# Altium PCB PCB1.PcbDoc
Units mil, origin at the board's own origin, x right, y up, seen from the top; angles counter-clockwise.
Board outline 4195.03 x 2725.03 mil, 2 copper layers (Top Layer, Bottom Layer); 22 components, 13 nets, 112 pads, 8 vias.
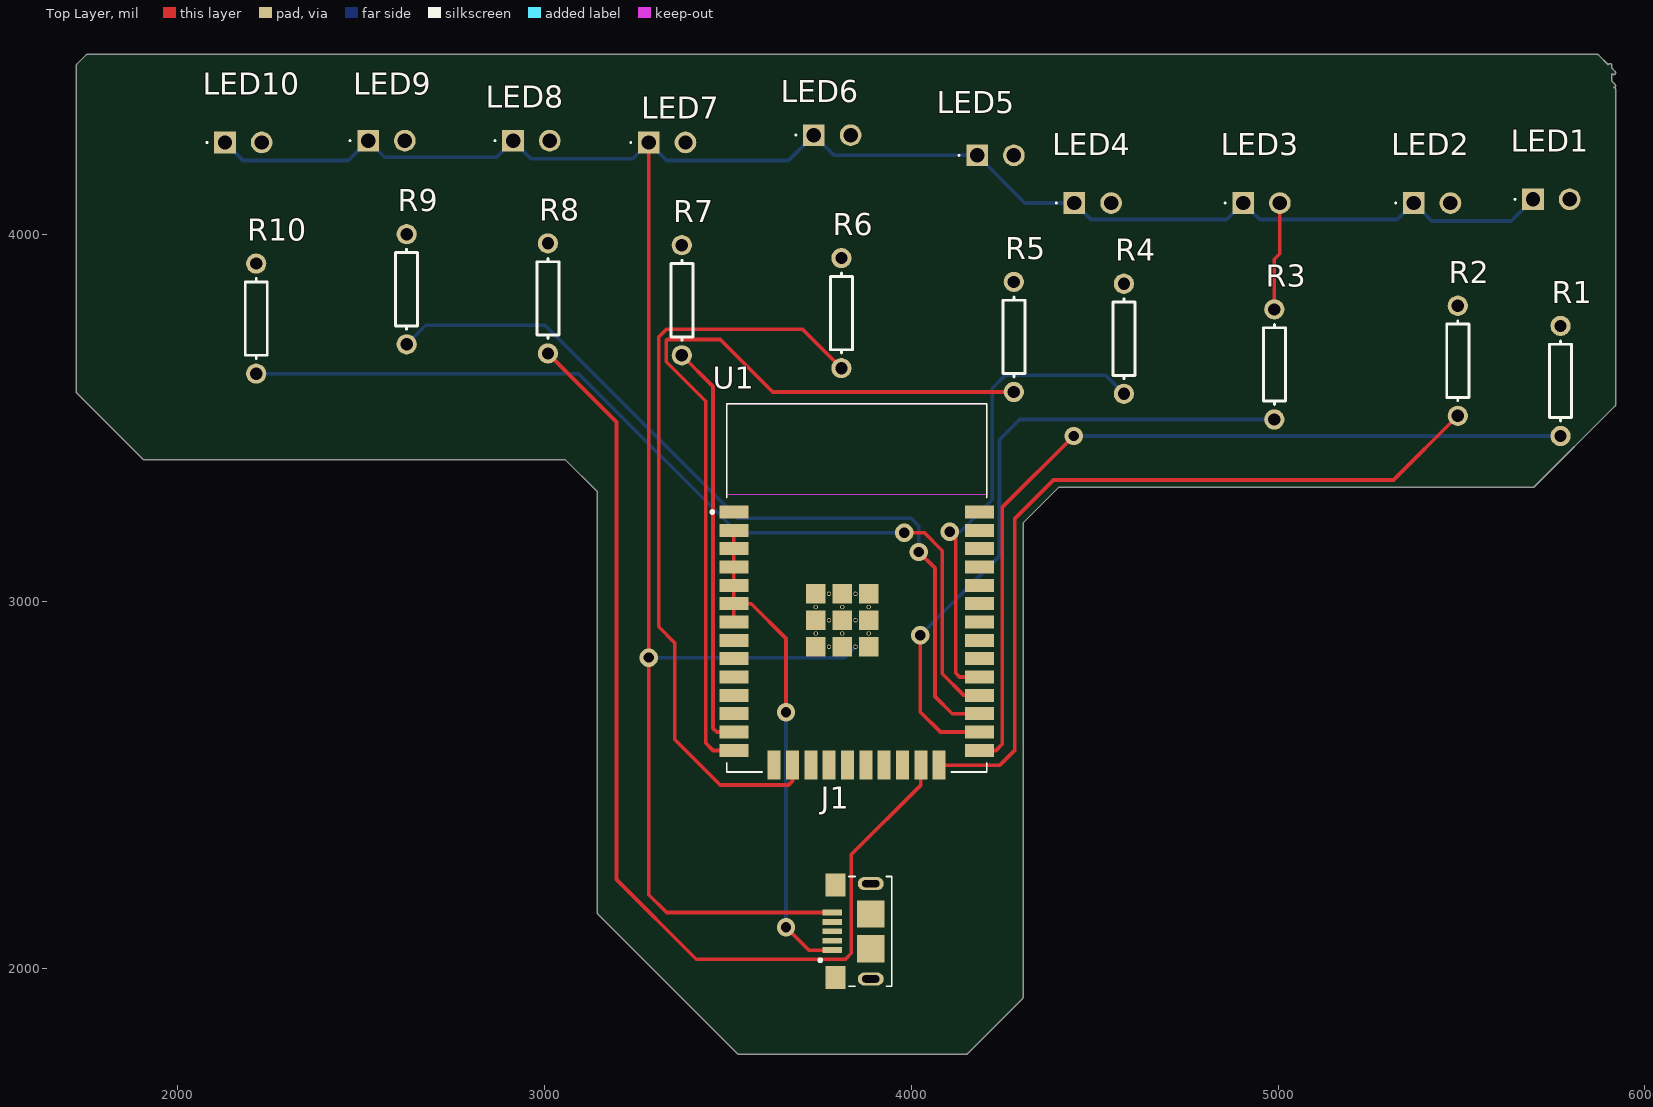
[diagram p0: Top Layer view]
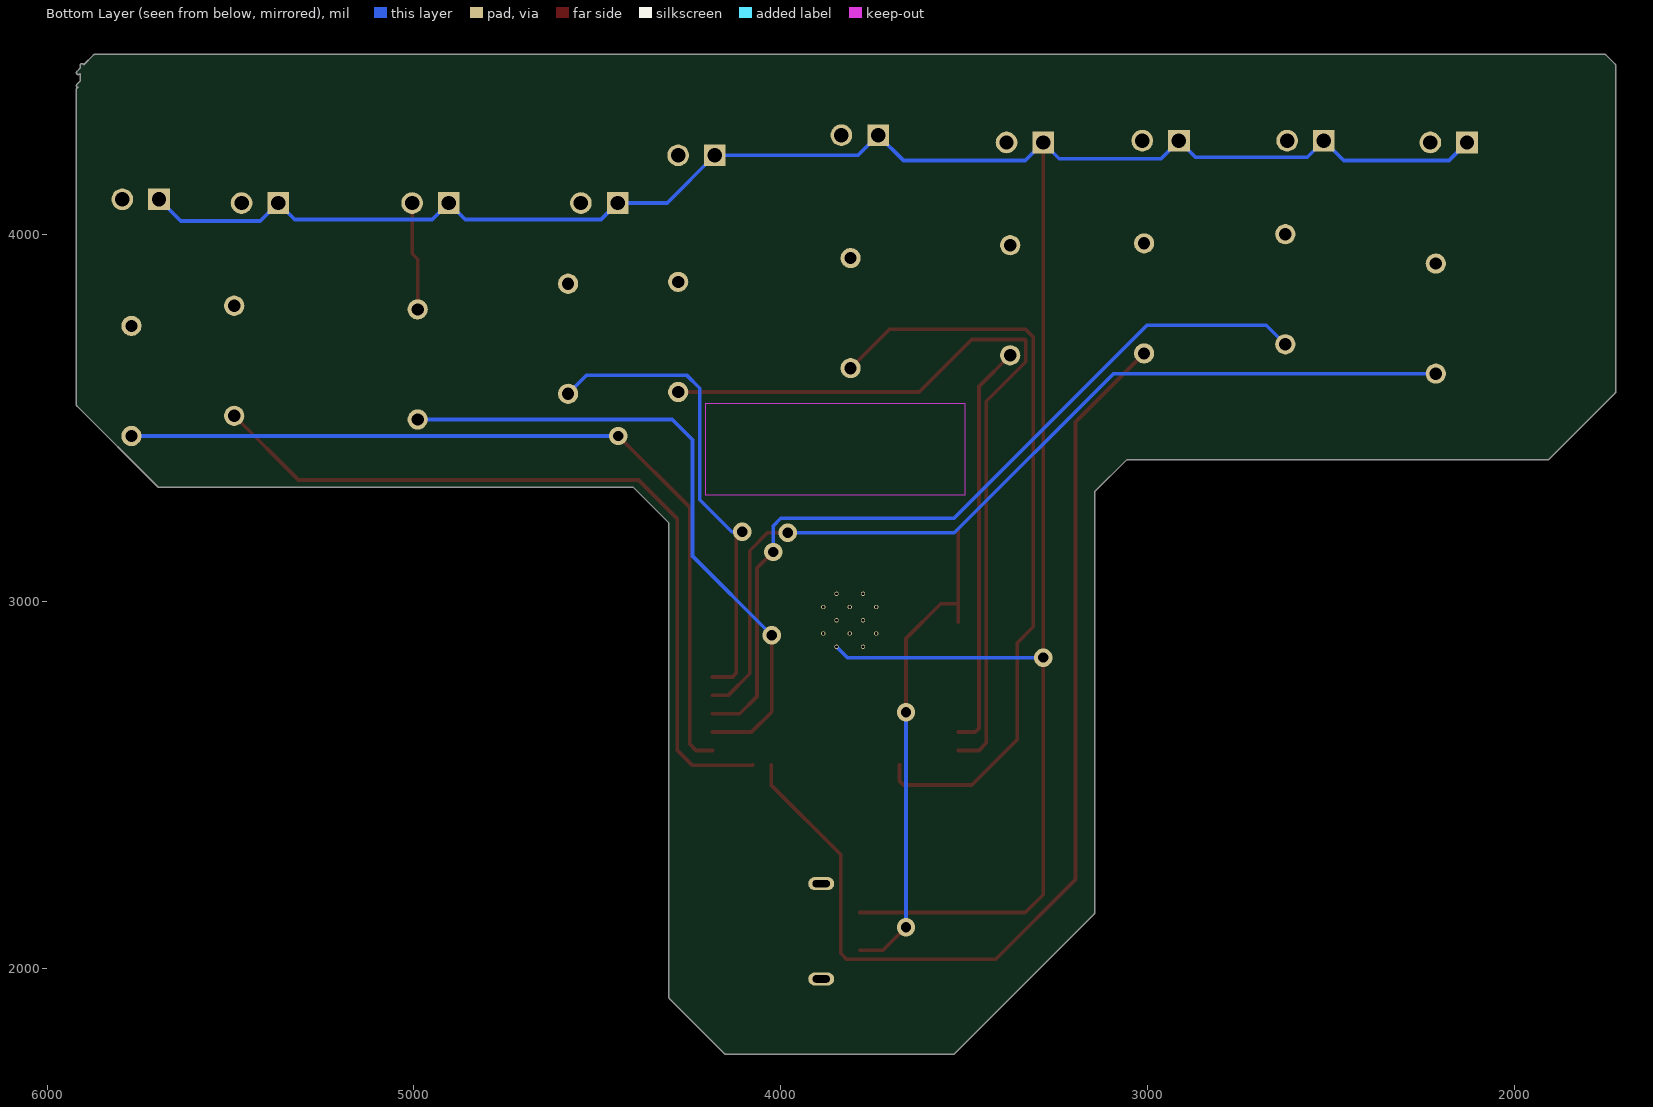
[diagram p1: Bottom Layer view, seen from below]
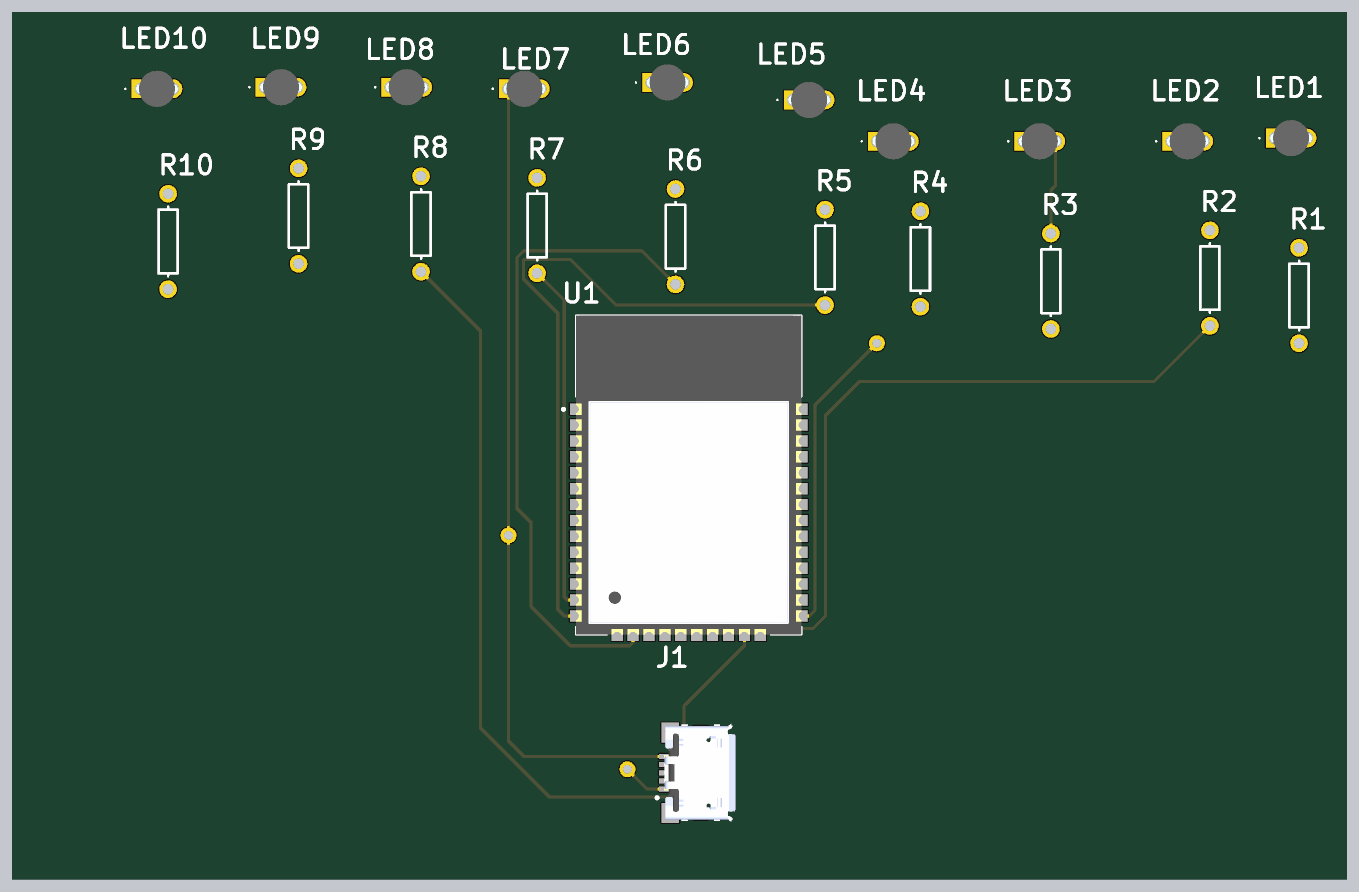
[diagram p2: 3D render of the assembled board from above, using the file's embedded part models]

## Layer stack, top to bottom
Top Solder: solder mask 0.4, Solder Resist, Dk 3.5
Top Layer: signal copper 1.4
Dielectric 1: dielectric 12.6, FR-4, Dk 4.8
Bottom Layer: signal copper 1.4
Bottom Solder: solder mask 0.4, Solder Resist, Dk 3.5

## Board outline
3146.45,2146.45 3526.45,1766.45 3526.44,1766.47 ccw(c3530,1770) 3530,1764.98 4150,1764.98 ccw(c4150,1770) 4153.56,1766.47 4153.55,1766.45 4303.55,1916.45 4303.53,1916.44 ccw(c4300,1920) 4305.02,1920 4305.02,3212.92 4402.08,3309.99 5695,3309.99 ccw(c5695,3315) 5698.56,3311.47 5698.55,3311.45 5918.55,3531.45 5918.53,3531.44 ccw(c5915,3535) 5920.02,3535 5920.02,4395 ccw(c5915,4395) 5915.39,4400 ccw(c5915,4405) 5920.02,4405 ccw(c5915,4405) 5918.55,4408.55 5910.02,4417.08 5910.02,4437.89 5911.45,4436.45 ccw(c5915,4440) 5920.02,4440 ccw(c5915,4440) 5918.55,4443.55 5910.02,4452.08 5910.02,4460 ccw(c5905,4460) 5900.31,4461.78 5873.55,4488.55 5873.56,4488.53 ccw(c5870,4485) 5870,4490.02 1755,4490.02 ccw(c1755,4485) 1751.44,4488.53 1751.45,4488.55 1726.45,4463.55 1726.47,4463.56 ccw(c1730,4460) 1724.98,4460 1724.98,3570 ccw(c1730,3570) 1726.47,3566.44 1726.45,3566.45 1906.45,3386.45 1906.44,3386.47 ccw(c1910,3390) 1910,3384.99 3057.92,3384.99 3144.99,3297.92 3144.99,2150 ccw(c3150,2150)

## Design rules (kind name [scope] priority, off if disabled: settings)
Clearance [All] p1: gap=10 ignorepadtopadclearanceinfootprint=FALSE except(0: Arc-Hole Track-Hole SMDPad-Hole THPad-Hole Via-Hole Fill-Hole Poly-Hole Region-Hole Text-Hole)
PolygonConnect [All] p1: connectstyle=Relief reliefconductorwidth=10 reliefentries=4 polygonreliefangle="90 Angle" airgapwidth=10
RoutingVias [All] p1: holewidth=28 width=50 viastyle="Through Hole" minholewidth=28 minwidth=50 maxholewidth=28 maxwidth=50
SolderMaskExpansion [All] p1: expansion=4 istentingtop=FALSE
Width [All] p1: maxlimit=10 minlimit=10 preferedwidth=10
30 further rules are at their usual default settings.

## Components (designator, comment, footprint, x,y, rotation, side; value= is the part's Value field where it differs from the comment)
J1 "10118193-0001LF" FCI_10118193-0001LF 3890,2100 r90 top
LED1 "15400385A3590" 15400385A3590 5695,4095 r0 top
LED2 "15400385A3590" 15400385A3590 5370,4085 r0 top
LED3 "15400385A3590" 15400385A3590 4905,4085 r0 top
LED4 "15400385A3590" 15400385A3590 4445,4085 r0 top
LED5 "15400385A3590" 15400385A3590 4180,4215 r0 top
LED6 "15400385A3590" 15400385A3590 3735,4270 r0 top
LED7 "15400385A3590" 15400385A3590 3285,4250 r0 top
LED8 "15400385A3590" 15400385A3590 2915,4255 r0 top
LED9 "15400385A3590" 15400385A3590 2520,4255 r0 top
LED10 "15400385A3590" 15400385A3590 2130,4250 r0 top
R1 "Res1" AXIAL-0.3 5770,3600 r90 top value=220R.
R2 "Res1" AXIAL-0.3 5490,3655 r90 top value=220R
R3 "Res1" AXIAL-0.3 4990,3645 r90 top value=220R
R4 "Res1" AXIAL-0.3 4580,3715 r90 top value=220R
R5 "Res1" AXIAL-0.3 4280,3720 r90 top value=220R
R6 "Res1" AXIAL-0.3 3810,3785 r90 top value=220R
R7 "Res1" AXIAL-0.3 3375,3820 r90 top value=220R
R8 "Res1" AXIAL-0.3 3010,3825 r90 top value=220R
R9 "Res1" AXIAL-0.3 2625,3850 r90 top value=220R
R10 "Res1" AXIAL-0.3 2215,3770 r90 top value=220R
U1 "ESP32-WROOM-32" MODULE_ESP32-WROOM-32 3851.61,3035.94 r0 top

## Footprints (in the part's own frame and the unit in brackets; to place one, negate y for a bottom-side part, rotate by r counter-clockwise, add the part's x,y. Pads: shape width x height; smd on the part's side, far side on the other; paste and mask are expansions set on the pad)
15400385A3590 [mm]
  rect 1.5x1.5 hole 1: 1(0,0)
  round 1.5 hole 1: 2(2.54,0)
  silkscreen extent -1.3,-0.05 -1.2,0.05, body extent -0.4,-1.45 2.94,1.45, height 11
AXIAL-0.3 [mm] "Axial Device, Thru-Hole; 2 Leads; 0.3 in Pin Spacing"
  round 1.4 hole 0.85: 1(-3.81,0) 2(3.81,0)
  silkscreen extent -2.77,-0.76 2.77,0.76
FCI_10118193-0001LF [mm]
  rect 0.4x1.35 smd: 1(-1.3,2.675) 2(-0.65,2.675) 3(0,2.675) 4(0.65,2.675) 5(1.3,2.675)
  rect 1.6x1.4 smd: S1(-3.2,2.45) S2(3.2,2.45)
  rect 1.9x1.9 smd: S3(1.2,0) S4(-1.2,0)
  oval 0.9x1.8 hole 0.5 slot 1.2 at 90 deg: S5(-3.3,0) S6(3.3,0)
  round 0.5 hole 0.5 unplated: ""(-3.3,0) ""(3.3,0)
  silkscreen extent -3.8,-1.45 3.8,3.6, body extent -3.93,-2.76 3.93,2.95, height 2.85
MODULE_ESP32-WROOM-32 [mm]
  rect 2x0.9 smd: 1(-8.5,5.26) 2(-8.5,3.99) 3(-8.5,2.72) 4(-8.5,1.45) 5(-8.5,0.18) 6(-8.5,-1.09) 7(-8.5,-2.36) 8(-8.5,-3.63) 9(-8.5,-4.9) 10(-8.5,-6.17) 11(-8.5,-7.44) 12(-8.5,-8.71) 13(-8.5,-9.98) 14(-8.5,-11.25) 25(8.5,-11.25) 26(8.5,-9.98) 27(8.5,-8.71) 28(8.5,-7.44) 29(8.5,-6.17) 30(8.5,-4.9) 31(8.5,-3.63) 32(8.5,-2.36) 33(8.5,-1.09) 34(8.5,0.18) 35(8.5,1.45) 36(8.5,2.72) 37(8.5,3.99) 38(8.5,5.26)
  rect 0.9x2 smd: 15(-5.715,-12.25) 16(-4.445,-12.25) 17(-3.175,-12.25) 18(-1.905,-12.25) 19(-0.635,-12.25) 20(0.635,-12.25) 21(1.905,-12.25) 22(3.175,-12.25) 23(4.445,-12.25) 24(5.715,-12.25)
  rect 1.33x1.33 smd: 39_1(-2.835,-0.405) 39_2(-1,-0.405) 39_3(0.835,-0.405) 39_4(-2.835,-2.24) 39_5(-1,-2.24) 39_6(0.835,-2.24) 39_7(-2.835,-4.075) 39_8(-1,-4.075) 39_9(0.835,-4.075)
  round 0.3 hole 0.2: 39_10(-1.918,-0.405) 39_11(-0.083,-0.405) 39_12(-2.835,-1.322) 39_13(-1,-1.322) 39_14(0.835,-1.322) 39_15(-1.918,-2.24) 39_16(-0.083,-2.24) 39_17(-2.835,-3.157) 39_18(-1,-3.157) 39_19(0.835,-3.157) 39_20(-1.918,-4.075) 39_21(-0.083,-4.075)
  Keep-Out Layer region: 9,6.45 -9,6.45 -9,12.75 9,12.75
  Keep-Out Layer region: 9,6.45 -9,6.45 -9,12.75 9,12.75
  silkscreen extent -10.1,-12.75 9,12.75, body extent -9,-12.75 9,12.75, height 3.2

## Part data
J1: "USB - micro B USB 2.0 Receptacle Connector 5 Position Surface Mount, Right Angle; Through Hole", Package=None, Availability="In Stock", Check_prices=https://www.snapeda.com/parts/10118193-0001LF/Amphenol+FCI/view-part/?ref=eda, MF=FCI, MP=10118193-0001LF, Price=None, Purchase-URL=https://pricing.snapeda.com/search/part/10118193-0001LF/?ref=eda, SnapEDA_Link=https://www.snapeda.com/parts/10118193-0001LF/Amphenol+FCI/view-part/?ref=snap
LED1 LED2 LED3 LED4 LED5 LED6 LED7 LED8 LED9 LED10: "LED", Manufacturer_Name="Wurth Elektronik", Mouser Part Number=710-15400385A3590, Datasheet Link=https://www.we-online.com/katalog/datasheet/15400385A3590.pdf, Height=10.9mm, Manufacturer_Part_Number=15400385A3590, Mouser Price/Stock=https://www.mouser.co.uk/ProductDetail/Wurth-Elektronik/15400385A3590?qs=5aG0NVq1C4yszs1ddn0oOg%3D%3D
R1 R2 R3 R4 R5 R6 R7 R8 R9 R10: "Resistor", LatestRevisionDate=17-Jul-2002, LatestRevisionNote="Re-released for DXP Platform.", PackageDescription="Axial Device, Thru-Hole; 2 Leads; 0.3 in Pin Spacing", PackageReference=AXIAL-0.3, Published=8-Jun-2000, Publisher="Altium Limited"
U1: "Bluetooth, WiFi 802.11b/g/n, Bluetooth v4.2 +EDR, Class 1, 2 and 3 Transceiver Module 2.4GHz ~ 2.5GHz Antenna Not Included, U.FL Surface Mount", Package="Module Espressif Systems", Availability="In Stock", Check_prices=https://www.snapeda.com/parts/ESP32-WROOM-32/Espressif+Systems/view-part/?ref=eda, MF="Espressif Systems", MP=ESP32-WROOM-32, Price=None, Purchase-URL=https://pricing.snapeda.com/search/part/ESP32-WROOM-32/?ref=eda, SnapEDA_Link=https://www.snapeda.com/parts/ESP32-WROOM-32/Espressif+Systems/view-part/?ref=snap

## Via types
v1: diameter 50, hole 28, Top Layer to Bottom Layer, 8 vias

## Nets (pads, with @x,y where several pads share a name; then routed paths per layer and width w, separated by ;. In a path a pad name is that pad's centre, name@x,y a point inside that pad or via, vN(x,y) a via of type N, cw(c..) or ccw(c..) an arc to the next point about the centre after c; other vN are vias at no path point)
GND: J1.5 LED1.1 LED2.1 LED3.1 LED4.1 LED5.1 LED6.1 LED7.1 LED8.1 LED9.1 LED10.1 U1.39_21 | length 7073.8
  Top Layer w10: LED7.1 v1(3285,2846) 3285,2200 3333.82,2151.18 J1.5
  Bottom Layer w10: LED10.1 2179,4201 2466,4201 LED9.1 2565,4210 2870,4210 LED8.1 2964,4206 3241,4206 LED7.1 3334,4201 3666,4201 LED6.1 3790,4215 LED5.1 4310,4085 LED4.1 4490,4040 4860,4040 LED3.1 4950,4040 5325,4040 LED2.1 5419,4036 5636,4036 LED1.1 ; v1(3285,2846) 3818.85,2846 U1.39_21
NetLED3_2: LED3.2 R3.2 | length 296.2
  Top Layer w10: R3.2 4990,3932 5005,3947 LED3.2
NetR1_1: R1.1 U1.25 | length 2316.5
  Top Layer w10: U1.25 4231.04,2593.03 4248.01,2610 4248.01,3255.01 v1(4443,3450)
  Bottom Layer w10: v1(4443,3450) R1.1
NetR2_1: R2.1 U1.24 | length 2178
  Top Layer w10: U1.24 4076.61,2553 4242,2553 4282,2593 4282,3224 4387.99,3329.99 5314.99,3329.99 R2.1
NetR3_1: R3.1 U1.26 | length 1787.3
  Top Layer w10: v1(4025,2907) 4025,2698.03 4080,2643.03 U1.26
  Bottom Layer w10: v1(4025,2907) 4241,3123 4241,3440 4296,3495 R3.1
NetR4_1: R4.1 U1.29 | length 1312.5
  Top Layer w10: v1(4105,3189) 4122,3172 4122,2803.03 4132,2793.03 U1.29
  Bottom Layer w10: v1(4105,3189) 4134,3189 4221,3276 4221,3580 4257,3616 4529,3616 R4.1
NetR5_1: R5.1 U1.14 | length 2235.1
  Top Layer w10: U1.14 3460,2593.03 3440,2613.03 3440,3544.81 3332.44,3652.37 3332.44,3710.5 3334.94,3713 3480,3713 3623,3570 R5.1
NetR6_1: R6.1 U1.16 | length 2086
  Top Layer w10: U1.16 3676.61,2510 3665.61,2499 3480,2499 3356,2623 3356,2886 3312,2930 3312,3720 3333,3741 3704,3741 R6.1
NetR7_1: R7.1 U1.13 | length 1113.3
  Top Layer w10: R7.1 3460,3585 3460,2653.03 3470,2643.03 U1.13
NetR8_1: R8.1 U1.23 | length 2840.2
  Top Layer w10: R8.1 3197,3488 3197,2241 3414,2024 3821,2024 3837,2040 3837,2309.39 4026.61,2499 U1.23
NetR9_1: R9.1 U1.27 | length 2268
  Top Layer w10: v1(4021,3134) 4065,3090 4065,2740.03 4112,2693.03 U1.27
  Bottom Layer w10: R9.1 2677,3752 3002,3752 3528,3226 4000,3226 4021,3205 v1(4021,3134)
NetR10_1: R10.1 U1.28 | length 2530.9
  Top Layer w10: v1(3981,3186) 4036.29,3186 4085,3137.29 4085,2802 4143.97,2743.03 U1.28
  Bottom Layer w10: R10.1 3093.5,3620 3527.5,3186 v1(3981,3186)
vcc: J1.1 U1.2 U1.3 U1.4 U1.5 U1.6 U1.7 | length 1369.8
  Top Layer w10: U1.7 U1.6 ; U1.2 U1.3 U1.4 U1.5 U1.6 ; v1(3659,2111) 3721.18,2048.82 J1.1 ; v1(3659,2697) 3659,2898 3563.97,2993.03 U1.6
  Bottom Layer w10: v1(3659,2111) v1(3659,2697)
pads on no net: J1. J1.2 J1.3 J1.4 J1.S1 J1.S2 J1.S3 J1.S4 J1.S5 J1.S6 LED1.2 LED2.2 LED4.2 LED5.2 LED6.2 LED7.2 LED8.2 LED9.2 LED10.2 R1.2 R2.2 R4.2 R5.2 R6.2 R7.2 R8.2 R9.2 R10.2 U1.1 U1.8 U1.9 U1.10 U1.11 U1.12 U1.15 U1.17 U1.18 U1.19 U1.20 U1.21 U1.22 U1.30 U1.31 U1.32 U1.33 U1.34 U1.35 U1.36 U1.37 U1.38 U1.39_1 U1.39_2 U1.39_3 U1.39_4 U1.39_5 U1.39_6 U1.39_7 U1.39_8 U1.39_9 U1.39_10 U1.39_11 U1.39_12 U1.39_13 U1.39_14 U1.39_15 U1.39_16 U1.39_17 U1.39_18 U1.39_19 U1.39_20

## Silkscreen, mask and mechanical layers (free items; w line width, h text height)
Mechanical 1:
  lines w10: 5900,4425 5905,4425 ; 5905,4460 5905,4415 5915,4405 ; 5915,4395 5915,3535 5695,3315 4400,3315 4300,3215 4300,1920 4150,1770 3530,1770 3150,2150 3150,3300 3060,3390 1910,3390 1730,3570 1730,4460 1755,4485 5870,4485 5915,4440

## Text inside footprints (layer, text, board x,y; h text height)
J1: Mechanical 13 "PCB END" at 3941.18,2287.01 h16 r90
U1: Mechanical 13 "ANTENNA" at 3615.39,3390.28 h70